# Altium PCB Wings_SMD_Breakout_v1.0.PcbDoc (part 2 of 2)
Units mil, origin at the board's own origin, x right, y up, seen from the top; angles counter-clockwise.
Board outline 2000 x 1181.1 mil, 2 copper layers (Top Layer, Bottom Layer), stack 61.756 mil thick; 50 components, 60 nets, 214 pads, 146 vias.
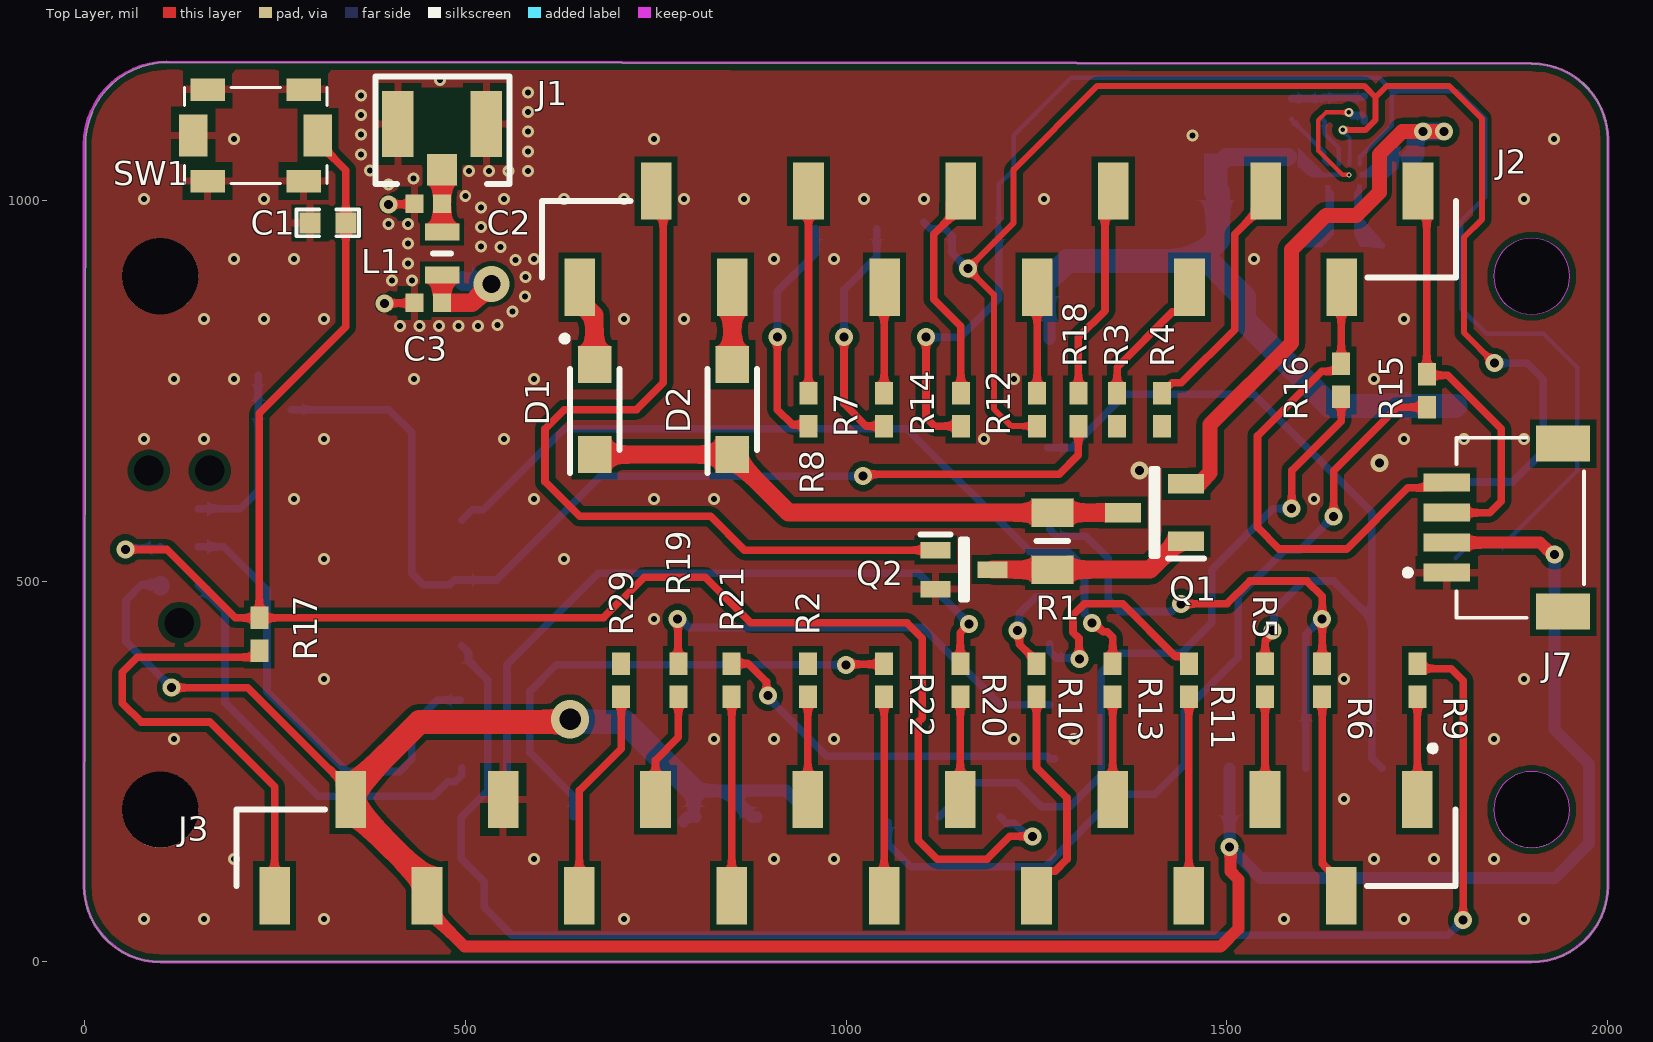
[diagram p0: Top Layer view]

## Silkscreen, mask and mechanical layers (free items; w line width, h text height) (continued)
Drill Drawing: (continued)
  text "Template" at 8762.76,2607.5 h72
  text "Description" at 9672.5,2607.5 h72
  text "Hole Tolerance (+)" at 10526.26,2607.5 h72
  text "Hole Tolerance (-)" at 11859.87,2607.5 h72
  text "1" at 2948.38,2457.5 h60
  text "0.100mm (3.94mil)" at 3538.22,2457.5 h60
  text "PTH" at 4687.88,2457.5 h60
  text "Round" at 5193.76,2457.5 h60
  text "Top Layer - Bottom Layer" at 5927.56,2457.5 h60
  text "Via" at 7427.11,2457.5 h60
  text "Rounded" at 8016.96,2457.5 h60
  text "v17h10" at 8762.76,2457.5 h60
  text "1" at 2948.38,2307.5 h60
  text "0.600mm (23.62mil)" at 3538.22,2307.5 h60
  text "PTH" at 4687.88,2307.5 h60
  text "Round" at 5193.76,2307.5 h60
  text "Top Layer - Bottom Layer" at 5927.56,2307.5 h60
  text "Via" at 7427.11,2307.5 h60
  text "Rounded" at 8016.96,2307.5 h60
  text "v120h60m140mx0" at 8762.76,2307.5 h60
  text "1" at 2948.38,2157.5 h60
  text "0.711mm (27.99mil)" at 3538.22,2157.5 h60
  text "PTH" at 4687.88,2157.5 h60
  text "Round" at 5193.76,2157.5 h60
  text "Top Layer - Bottom Layer" at 5927.56,2157.5 h60
  text "Via" at 7427.11,2157.5 h60
  text "Rounded" at 8016.96,2157.5 h60
  text "v127h71m147mx0" at 8762.76,2157.5 h60
  text "2" at 2948.38,2007.5 h60
  text "0.150mm (5.91mil)" at 3538.22,2007.5 h60
  text "PTH" at 4687.88,2007.5 h60
  text "Round" at 5193.76,2007.5 h60
  text "Top Layer - Bottom Layer" at 5927.56,2007.5 h60
  text "Via" at 7427.11,2007.5 h60
  text "Rounded" at 8016.96,2007.5 h60
  text "v30h15" at 8762.76,2007.5 h60
  text "3" at 2948.38,1857.5 h60
  text "0.991mm (39.02mil)" at 3538.22,1857.5 h60
  text "NPTH" at 4687.88,1857.5 h60
  text "Round" at 5193.76,1857.5 h60
  text "Top Layer - Bottom Layer" at 5927.56,1857.5 h60
  text "Pad" at 7427.11,1857.5 h60
  text "Rounded" at 8016.96,1857.5 h60
  text "c65hn99" at 8762.76,1857.5 h60
  text "4" at 2948.38,1707.5 h60
  text "2.540mm (100.00mil)" at 3538.22,1707.5 h60
  text "NPTH" at 4687.88,1707.5 h60
  text "Round" at 5193.76,1707.5 h60
  text "Top Layer - Bottom Layer" at 5927.56,1707.5 h60
  text "Pad" at 7427.11,1707.5 h60
  text "Rounded" at 8016.96,1707.5 h60
  text "c254hn254" at 8762.76,1707.5 h60
  text "30" at 2948.38,1557.5 h60
  text "0.300mm (11.81mil)" at 3538.22,1557.5 h60
  text "PTH" at 4687.88,1557.5 h60
  text "Round" at 5193.76,1557.5 h60
  text "Top Layer - Bottom Layer" at 5927.56,1557.5 h60
  text "Via" at 7427.11,1557.5 h60
  text "Rounded" at 8016.96,1557.5 h60
  text "(Mixed)" at 8762.76,1557.5 h60
  text "111" at 2948.38,1407.5 h60
  text "0.200mm (7.87mil)" at 3538.22,1407.5 h60
  text "PTH" at 4687.88,1407.5 h60
  text "Round" at 5193.76,1407.5 h60
  text "Top Layer - Bottom Layer" at 5927.56,1407.5 h60
  text "Via" at 7427.11,1407.5 h60
  text "Rounded" at 8016.96,1407.5 h60
  text "(Mixed)" at 8762.76,1407.5 h60
  text "153 Total" at 2948.38,1257.5 h60